# Altium PCB DCDCProtoNeg.PcbDoc
Units mil, origin at the board's own origin, x right, y up, seen from the top; angles counter-clockwise.
Board outline 2500 x 612 mil, 2 copper layers (Top Layer, Bottom Layer); 38 components, 26 nets, 113 pads, 38 vias.
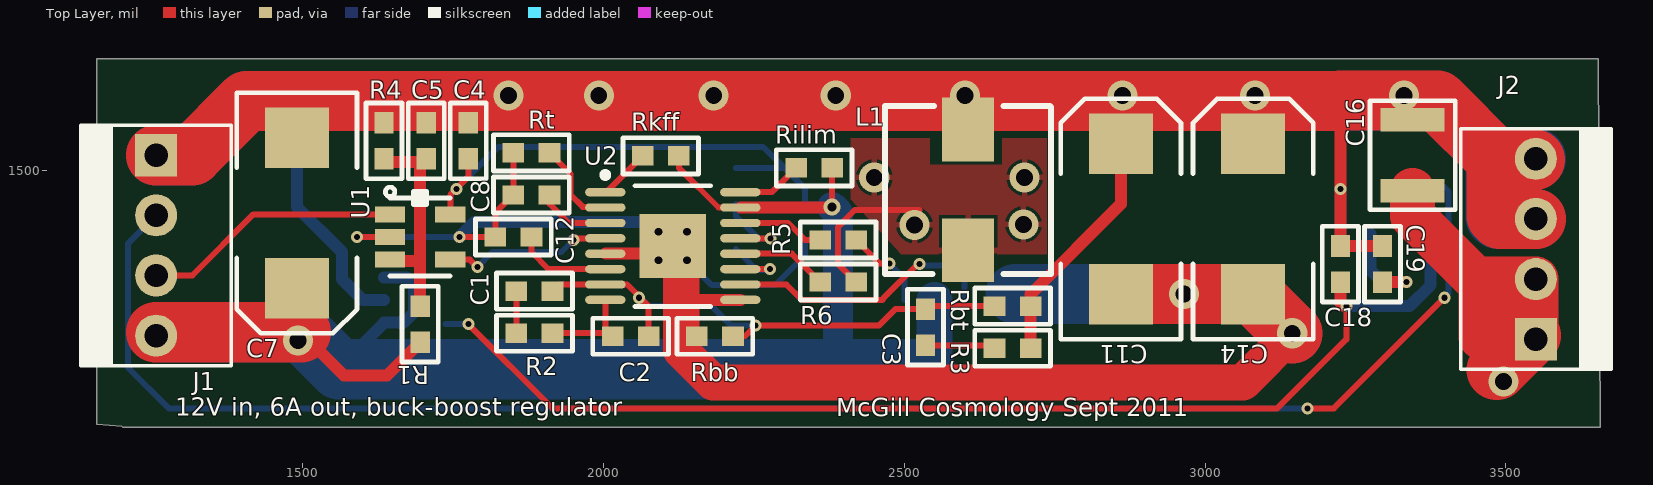
[diagram p0: Top Layer view]
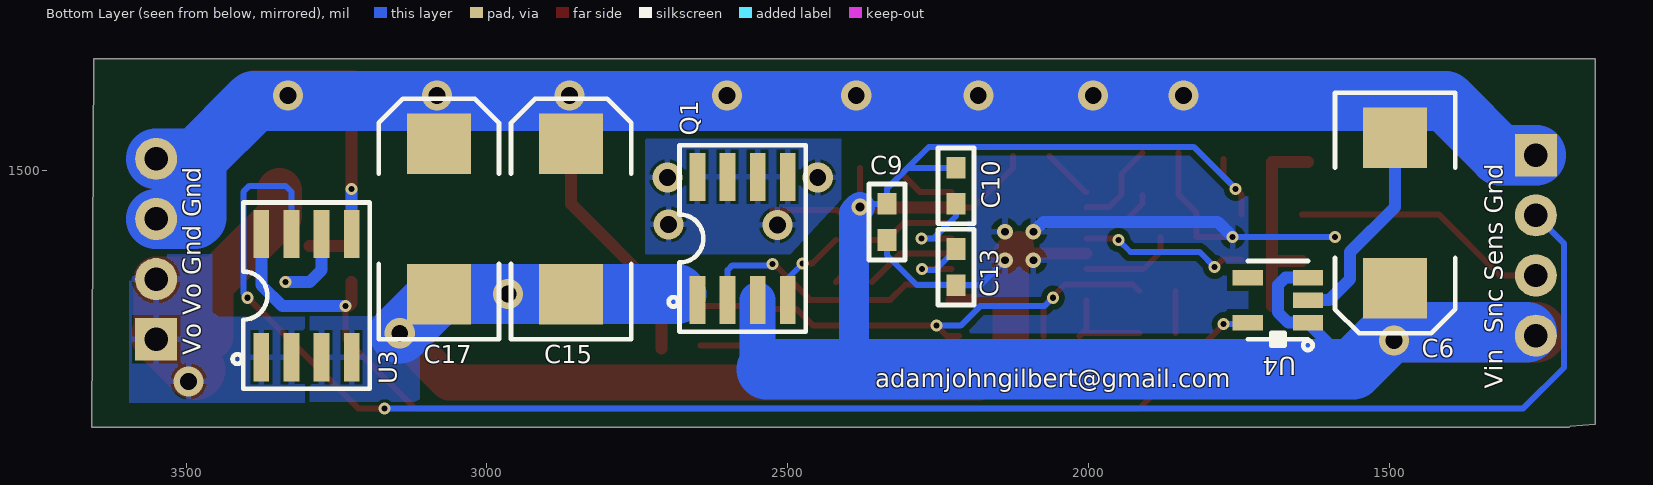
[diagram p1: Bottom Layer view, seen from below]

## Layer stack, top to bottom
Top Layer: signal copper 1.4
Dielectric: dielectric 12.6, FR-4, Dk 4.8
Bottom Layer: signal copper 1.4

## Board outline
1199,1075 1157,1079 1157,1686 3654,1686 3657,1074 1201,1074

## Design rules (kind name [scope] priority, off if disabled: settings)
Clearance [All] p1: gap=5
MinimumSolderMaskSliver [All] p1: minsoldermaskwidth=0
PolygonConnect [All] p1: connectstyle=Relief reliefconductorwidth=10 reliefentries=4 polygonreliefangle="90 Angle"
RoutingVias [All] p1: holewidth=28 width=20 viastyle="Through Hole" minholewidth=10 minwidth=20 maxholewidth=28 maxwidth=50
SilkToSilkClearance [All] p1: silktosilkclearance=0
SilkscreenOverComponentPads [All] p1: minsilkscreentomaskgap=3
SolderMaskExpansion [All] p1: expansion=4
Width [All] p1: maxlimit=500 minlimit=10 preferedwidth=10
25 further rules are at their usual default settings.

## Components (designator, comment, footprint, x,y, rotation, side; value= is the part's Value field where it differs from the comment)
C1 "250pF" 0603 1855,1300 r0 top
C2 "40pF" 0603 2015,1225 r0 top
C3 "250pF" 0603 2535,1270 r270 top
C4 "0.1uF" 0603 1775,1520 r90 top
C5 "0.1uF" 0603 1705,1580 r270 top
C6 "33uF, 35V, T495X336K035ATE100" TCASE-D 1490,1305 r90 bottom
C7 "33uF, 35V, T495X336K035ATE100" TCASE-D 1490,1305 r90 top
C8 "1uF, 50V, X5R" 0603 1910,1460 r180 top
C9 "1uF, 50V, X5R" 0603 2335,1385 r90 bottom
C10 "1uF, 50V, X5R" 0603 2220,1505 r270 bottom
C11 "68uF, 20V, T495D686K020ZTE070" TCASE-D 2860,1545 r270 top
C12 "3.3nF" 0603 1820,1390 r0 top
C13 "1uF, 50V, X5R" 0603 2220,1370 r270 bottom
C14 "68uF, 20V, T495D686K020ZTE070" TCASE-D 3080,1545 r270 top
C15 "68uF, 20V, T495D686K020ZTE070" TCASE-D 2860,1545 r270 bottom
C16 "TMK325BJ226MM-T (Ceramic)" 1210 3345,1585 r270 top
C17 "68uF, 20V, T495D686K020ZTE070" TCASE-D 3080,1545 r270 bottom
C18 "2.2uF" 0603 3225,1375 r270 top
C19 "40pF" 0603 3295,1315 r90 top
J1 "Header 4" CON4M 1256,1526 r270 top
J2 "Header 4" CON4M 3550,1220 r90 top
L1 "Inductor" Wurth744311220 2606,1368 r90 top
Q1 "Si4564DY" SO8 2650,1285 r90 bottom
R1 "Res0603" 0603 1695,1275 r270 top
R2 "Res0603" 0603 1915,1230 r180 top
R3 "Res0603" 0603 2650,1205 r0 top
R4 "Res0603" 0603 1635,1580 r270 top
R5 "Res0603" 0603 2360,1385 r0 top
R6 "Res0603" 0603 2360,1315 r0 top
Rbb "Res0603" 0603 2155,1225 r0 top
Rbt "Res0603" 0603 2650,1275 r0 top
Rilim "Res0603" 0603 2320,1505 r0 top
Rkff "Res0603" 0603 2125,1525 r180 top
Rt "Res0603" 0603 1850,1530 r0 top
U1 "AP331AWRGDICT" SOT23-5 1645,1390 r270 top
U2 "TPS40061" TSOP65P640X120_HS-16N 2115,1375 r0 top
U3 "ACS713" SO8 3375,1190 r90 bottom
U4 "LD2980" SOT23-5 1635,1285 r90 bottom

## Footprints (in the part's own frame and the unit in brackets; to place one, negate y for a bottom-side part, rotate by r counter-clockwise, add the part's x,y. Pads: shape width x height; smd on the part's side, far side on the other; paste and mask are expansions set on the pad)
0603 [mil]
  rect 36x32 smd: 1(0,0) 2(60,0)
  silkscreen extent -33,-30 93,30
1210 [mm]
  rect 1x2.7 smd: 1(0,0) 2(3,0)
  silkscreen extent -0.8,-1.8 3.8,1.8
CON4M [mil]
  rect 70x70 hole 39: 1(0,0)
  round 70 hole 39: 2(100,0) 3(200,0) 4(300,0)
  silkscreen extent -50,-125 350,125
SO8 [mil]
  rect 80x26 smd: 1(0,0) 2(0,-50) 3(0,-100) 4(0,-150) 5(205,-150) 6(205,-100) 7(205,-50) 8(205,0)
  silkscreen extent -53,-180 258,48
SOT23-5 [mil]
  rect 26x50 smd: 1(-37.5,0) 2(0,0) 3(37.5,0) 4(37.5,100) 5(-37.5,100)
  silkscreen extent -83,-8 65,100
TCASE-D [mm]
  rect 2.55x2.7 smd: 1(0,0) 2(6.35,0)
  silkscreen extent -1.91,-2.54 8.25,2.54
TSOP65P640X120_HS-16N [mm] "TSOP, 16-Leads, Body 5.1x4.5mm (max), Pitch 0.65mm, IPC Medium Density"
  oval 1.7x0.35 smd: 1(-2.85,2.275) 2(-2.85,1.625) 3(-2.85,0.975) 4(-2.85,0.325) 5(-2.85,-0.325) 6(-2.85,-0.975) 7(-2.85,-1.625) 8(-2.85,-2.275) 9(2.85,-2.275) 10(2.85,-1.625) 11(2.85,-0.975) 12(2.85,-0.325) 13(2.85,0.325) 14(2.85,0.975) 15(2.85,1.625) 16(2.85,2.275)
  rect 2.8x2.7 smd: 17(0,0)
  silkscreen extent -2.97,-2.55 1.6,3.12, body extent -2.25,-2.55 2.25,2.55, height 1.2
Wurth744311220 [mm] "Inductor"
  rect 2.7x2.2 smd: 1(0,0) 2(5.1,0)
  silkscreen extent -1,-3.5 6.1,3.5

## Part data
C1 C2 C3 C12 C19: library part Cap0603, "Capacitor, Ceramic, 0603"
C4 C5 C9 C18: library part Cap0603, "UMK107BJ105KA-T"
C6 C7 C11 C14 C15 C17: library part CapPol3, "CAP TANT 68UF 20V 10% 2917 70mOhm"
C8 C10 C13: library part Cap0603, "Capacitor, Ceramic, 0603 - UMK107BJ105KA-T"
C16: library part "Cap Pol3", "CAP CER 100UF 10V X5R 1210 20%"
J1 J2: "Header, 0.1\"  4-Pin straight"
L1: library part Wurth744311220
R1 R2 R3 R4 R5 R6 Rbb Rbt Rilim Rkff Rt: "Resistor"
U2: library part TPS40061PWPR, "Buck Controller"
U3: "Hall effect current sensor 0-20A"
U4: "Regulator"

## Via types
v1: diameter 20, hole 10, Top Layer to Bottom Layer, 17 vias
v2: diameter 50, hole 28, Top Layer to Bottom Layer, 16 vias
v3: diameter 25.98, hole 12.99, Top Layer to Bottom Layer, tented top, 4 vias
v4: diameter 28, hole 15, Top Layer to Bottom Layer, 1 vias

## Nets (pads, with @x,y where several pads share a name; then routed paths per layer and width w, separated by ;. In a path a pad name is that pad's centre, name@x,y a point inside that pad or via, vN(x,y) a via of type N, cw(c..) or ccw(c..) an arc to the next point about the centre after c; other vN are vias at no path point)
GND: C4.2 C5.1 C6.2 C7.2 C11.1 C14.1 C15.1 C16.1 C17.1 C18.1 C19.2 J1.1 J2.3 J2.4 L1.2 R3.2 R4.1 Rbt.2 U3.5 U4.2 | length 6206.8
  Top Layer w20: R3.2 Rbt.2 2710,1295 2860,1445 C11.1 ; 3225,1617 3225,1616 v1(3225,1470) C18.1 C19.2
  Top Layer w100: J1.1 1316,1526 1406,1616 1775,1616 1992,1616 2860,1616 3080,1616 3225,1616 ; 3225,1617 3386.43,1617 3485,1518.43 ; J2.4@3548.43,1518.43 3485,1518.43 ; J2.3 3490,1420 3485,1425 3485,1518.43
  Bottom Layer w20: C6.2 1490,1440 1565,1365 1565,1320 1600,1285 U4.2 ; U3.5 v1(3225,1470)
  Bottom Layer w100: J1.1 1316,1526 1406,1616 2386,1616 3083,1616 3387.43,1616 3483.43,1520 ; J2.3 3486,1420 3483.43,1422.57 3483.43,1520 ; J2.4 3483.43,1520
  other v2: 1842,1625 1992,1625 2183,1625 2386,1625 2601,1625 2863,1625 3083,1625 3331,1625
ISENSE: J1.2 U3.7 | length 2903
  Top Layer w10: v1(3170,1105) 3214,1105 v1(3398,1289)
  Bottom Layer w10: J1.2 1209,1379 1209,1173 1277,1105 v1(3170,1105) ; U3.7 3325,1465 3335,1475 3395,1475 3405,1465 3405,1296 v1(3398,1289)
N5V: C8.2 C9.1 C11.2 C12.1 C13.2 C14.2 C15.2 C17.2 Q1.1 Rbb.1 Rt.1 U1.2 U2.5 U2.9 U2.17 U3.3 U3.4 | length 3299.2
  Top Layer w10: v1(1590,1390) U1.2 ; v1(1760,1390) C12.1 1820,1430 C8.2 Rt.1
  Top Layer w20: U2.5 2102.2,1362.2 U2.17 ; 2155,1285 2155.43,1285.43 U2.9
  Top Layer w50: U2.17 2129,1361 v3(2138.62,1351.38)
  Top Layer w60: U2.17@2129,1361 2129,1201 2182,1148 3063,1148 v2(3145,1230)
  Top Layer w100: C11.2 v2(2965,1295) C14.2 v2(3145,1230)
  Bottom Layer w10: v1(1590,1390) v1(1760,1390) ; v3(2138.62,1351.38) 2180,1310 C13.2 2285,1310 2335,1360 C9.1
  Bottom Layer w20: v1(1760,1390) 1785,1415 2075,1415 v3(2091.38,1398.62)
  Bottom Layer w100: 2685,1295 C15.2 v2(2965,1295) C17.2 v2(3145,1230)
  other v3: 2091.38,1351.38 2138.62,1398.62
NetC1_1: C1.1 R2.2 | length 70
  Top Layer w10: R2.2 C1.1
NetC2_1: C2.1 R2.1 U2.8 | length 160.5
  Top Layer w10: R2.1 C2.1@2010,1230 ; U2.8 2002.8,1237.2 C2.1@2010,1230 ; C2.1 C2.1@2010,1230
NetC3_2: C3.2 R3.1 | length 110
  Top Layer w10: C3.2 R3.1@2645,1210
NetC5_2: C5.2 R1.1 R4.2 U1.3 | length 350
  Top Layer w20: R4.2@1635,1515 1695,1515 1695,1350 ; U1.3@1645,1350 1695,1350 ; R1.1 1695,1350
NetC8_1: C8.1 U2.3 | length 120.9
  Top Layer w10: C8.1 1910,1445 1941.61,1413.39 U2.3
NetC10_2: C10.2 U2.13 | length 143.8
  Top Layer w10: U2.13 v1(2277.8,1387.8)
  Bottom Layer w10: C10.2 2220,1425 2257.2,1387.8 v1(2277.8,1387.8)
NetC12_2: C12.2 U2.6 | length 159.6
  Top Layer w10: C12.2 1880,1365 1908.39,1336.61 U2.6
NetC13_1: C13.1 U2.11 | length 126
  Top Layer w10: U2.11 v1(2276.61,1336.61)
  Bottom Layer w10: C13.1 2255,1335 2275,1335 v1(2276.61,1336.61) v1@2280,1340
NetC18_2: C18.2 U3.8 U4.5 | length 1944.7
  Top Layer w10: v1(1775,1245) 1915,1105 3120,1105 3235,1220 v1(3235,1275)
  Top Layer w20: C18.2 3225,1280 3230,1275 v1(3235,1275)
  Bottom Layer w10: U4.5@1737.5,1245 v1(1775,1245)
  Bottom Layer w20: v1(3235,1275) 3340,1275 3375,1310 U3.8
NetC19_1: C19.1 U3.6 | length 168.3
  Top Layer w20: C19.1 v1(3335,1315)
  Bottom Layer w20: U3.6 3275,1335 3295,1315 v1(3335,1315)
NetL1_1: L1.1 Q1.5 Q1.6 Q1.7 Q1.8 R6.2 | length 258.1
  Top Layer w10: R6.2 2390,1345 2390,1407 2418,1435 2525,1435
  Bottom Layer w40: v2(2450,1489) v2@2451,1490 ; v2(2517,1410) v2@2518,1411 ; v2(2698,1411) v2@2700,1413 ; v2@2699,1490 v2(2700,1489)
NetQ1_2: Q1.2 U2.10 | length 461.5
  Top Layer w10: U2.10 2303.98,1311.02 2330,1285 2464,1285 ; 2465,1288 v1@2523.5,1346.5
  Bottom Layer w10: v1@2525,1350 2532,1343 2592,1343 2600,1335 Q1.2
  other v1: 2525,1345
NetQ1_4: Q1.4 R5.2 | length 142.5
  Top Layer w10: R5.2 2459,1346 v1(2475,1346)
  Bottom Layer w10: v1(2475,1346) 2500,1321 Q1.4
NetR5_1: R5.1 U2.14 | length 144.6
  Top Layer w10: U2.14 2306.61,1413.39 2335,1385 R5.1
NetR6_1: R6.1 U2.12 | length 152.3
  Top Layer w10: U2.12 2312.8,1362.2 R6.1
NetRilim_1: Rilim.1 U2.16 | length 109.5
  Top Layer w10: U2.16 2279.57,1464.57 Rilim.1
NetRkff_2: Rkff.2 U2.1 | length 87.2
  Top Layer w10: U2.1 2003.23,1465 2005,1465 Rkff.2
NetRt_2: Rt.2 U2.2 | length 151
  Top Layer w10: Rt.2 1945,1495 1945,1460 1965,1440 2001.77,1440 U2.2
SYNC: U1.4 U2.4 | length 277.8
  Top Layer w10: U1.4 1777.5,1352.5 v1(1790,1340) ; v1(1950,1385) v1@1952.8,1387.8 ; v1@1957.8,1387.8 U2.4
  Bottom Layer w10: v1(1790,1340) 1815,1365 1930,1365 v1(1950,1385)
SYNCIN: J1.3 U1.1 | length 431
  Top Layer w10: J1.3 1316,1326 1417.5,1427.5 U1.1
VBIAS: C1.2 C2.2 C3.1 Rbb.2 Rbt.1 U2.7 | length 919.8
  Top Layer w10: C1.2 1926.02,1311.02 U2.7 2038.98,1311.02 2075,1275 ; v1(2059,1289) 2061,1289 2075,1275 ; C2.2 2075,1275 ; Rbb.2 2235,1225 v1(2252.5,1242.5) 2457.5,1242.5 2485,1270 C3.1 2540,1275 Rbt.1
  Bottom Layer w10: v1(2059,1289) 2073,1275 2180,1275 2212.5,1242.5 v1(2252.5,1242.5)
VIN: C4.1 C6.1 C7.1 C9.2 C10.1 J1.4 Q1.3 R1.2 Rilim.2 Rkff.1 U1.5 U2.15 U4.1 U4.3 | length 3701.7
  Top Layer w10: U1.5 1745,1460 v1(1755,1470) 1775,1490 C4.1 ; Rkff.1 2125,1505 2191.02,1438.98 U2.15 ; v4(2380,1440) Rilim.2
  Top Layer w20: v2@1496.57,1231.57 1568.15,1160 1640,1160 R1.2 ; U2.15 v4@2380,1438.98
  Top Layer w100: J1.4@1256,1231.57 v2@1496.57,1231.57
  Bottom Layer w10: v1(1755,1470) 1825,1540 2265,1540 2300,1505 ; C10.1 2300,1505 ; v4@2385,1435 v4(2380,1440) 2375,1445 C9.2 2335,1470 2300,1505
  Bottom Layer w20: 1560,1170 1560,1172.5 U4.1 1667.5,1247.5 1685,1265 1685,1310 1672.5,1322.5 U4.3
  Bottom Layer w50: v4(2380,1440) 2390,1430 2390,1170 ; 2535,1170 2550,1185
  Bottom Layer w60: 2550,1185 Q1.3
  Bottom Layer w100: J1.4@1271,1231.57 1498.43,1231.57 1560,1170 2380,1170 ; 2390,1170 2535,1170
  other v2: 1492,1218
VO: C16.2 J2.1 J2.2 U3.1 U3.2 | length 694.9
  Top Layer w75: C16.2 3345,1425 3459,1311 3459,1276 ; 3468,1320 J2.2 ; 3506,1276 3459,1276 ; J2.1@3542,1226 3461,1226 3459,1224 3459,1276 ; J2.2@3542,1312 J2.2 ; J2.1 J2.2
  Top Layer w100: v2@3485,1169 J2.1@3542,1226
  other v2: 3496,1150
pads on no net: U4.4

## Polygon pours and split planes (outlines as drawn)
N5V on Bottom Layer "TopOverlay-No Net" (solid, pour order 12): 1734,1556 2200.98,1556 2200.98,1229 2202,1228 1734,1228
VO on Bottom Layer "TopOverlay-No Net" (solid, pour order 10): 3595,1361 3595,1114 3303,1114 3303,1257.32 3447.14,1257.32 3449.62,1259.35 3457.08,1265.45 3457.08,1361 3593.76,1361
N5V on Bottom Layer "TopOverlay-No Net" (solid, pour order 8): 3295,1250.17 3295,1116 3111.9,1116 3111,1117.96 3111.9,1119.92 3111.9,1258 3295,1258
NetL1_1 on Bottom Layer "TopOverlay-No Net" (solid, pour order 6): 2411,1453 2496,1361 2736,1361 2737,1362 2737,1553 2736,1552 2736,1553 2411,1553
NetL1_1 on Top Layer "TopOverlay-No Net" (solid, pour order 2): 2737,1554 2663,1554 2663,1510 2542,1510 2542,1554 2411,1554 2411,1453 2494.63,1361.39 2735.95,1361.39 2737,1360

## Silkscreen, mask and mechanical layers (free items; w line width, h text height)
Top Overlay:
  text "12V in, 6A out, buck-boost regulator" at 1288,1093 h30
  text "McGill Cosmology Sept 2011" at 2387,1092 h30
Bottom Overlay:
  text "Vo Vo Gnd Gnd" at 3476,1193 h30 r270
  text "adamjohngilbert@gmail.com" at 2354,1140 h30
  text "Vin  Snc Sens Gnd" at 1311,1138 h30 r270